# EAGLE board miniledcube (EAGLE 5.10)
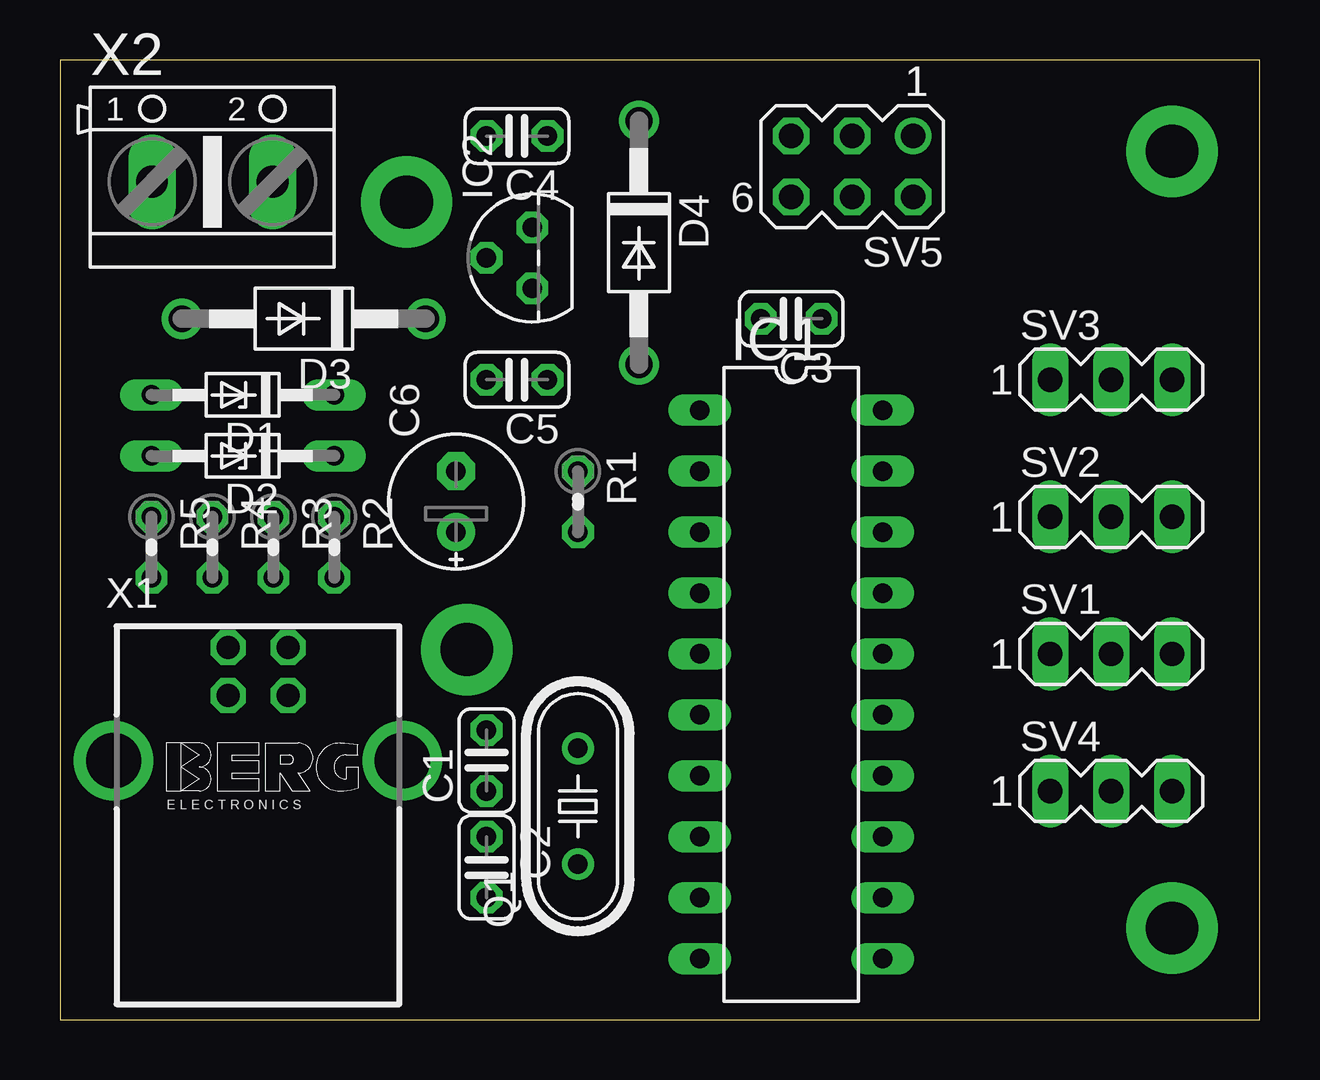
[diagram p0: board, top side]
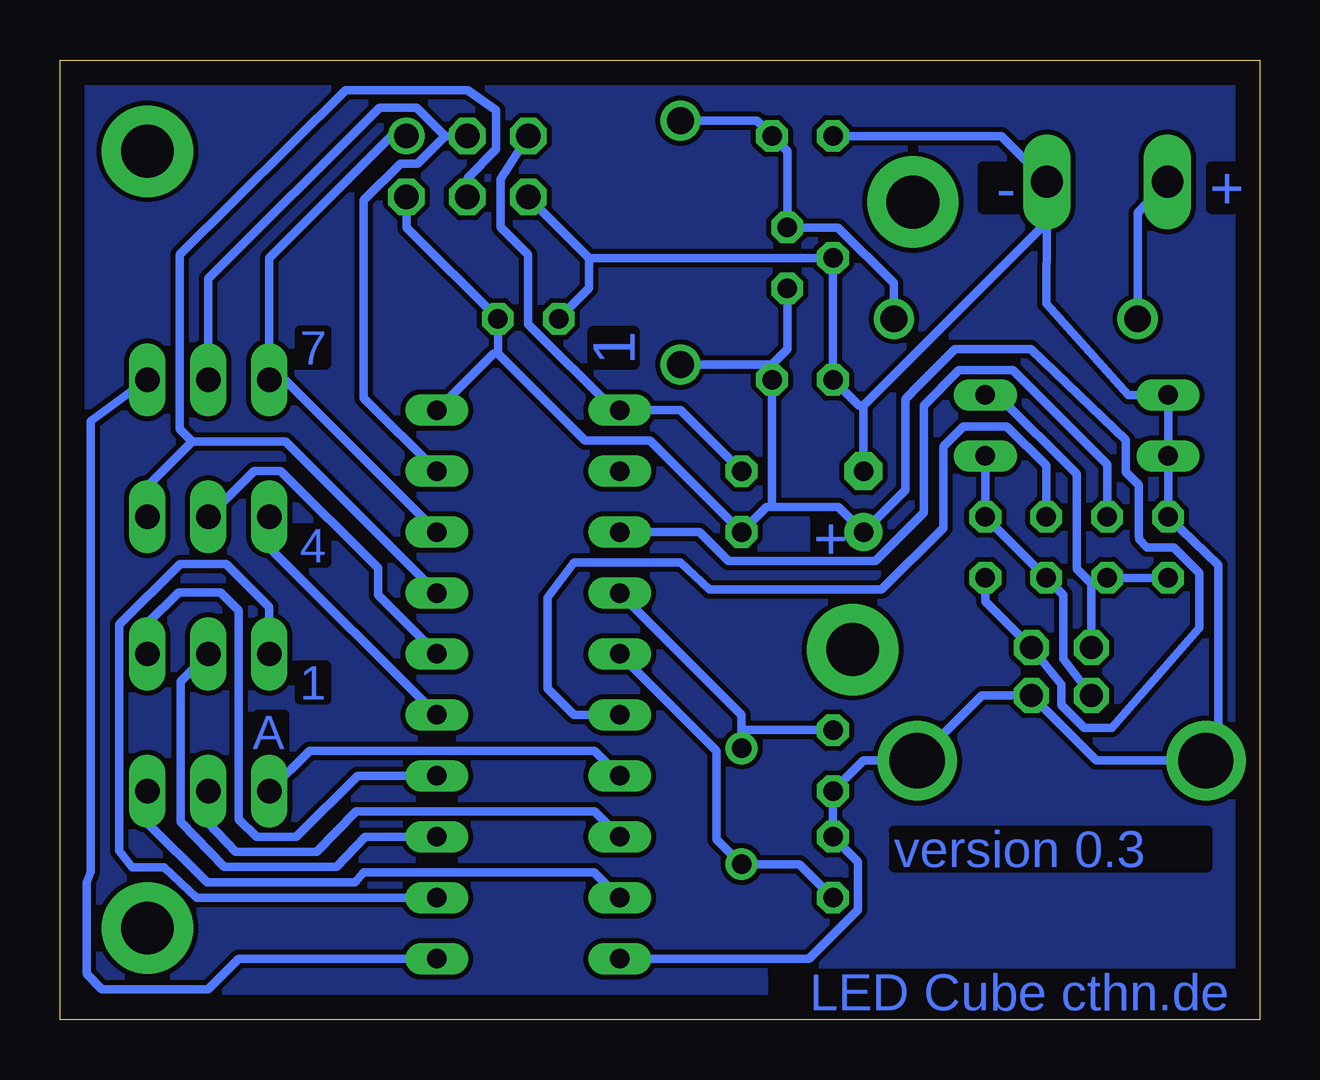
[diagram p1: board, bottom side, seen from below]

Size 50 x 40 mm. Coordinates in mm from the lower left corner, seen from the top.
Outline: 0,0 50,0 50,40 0,40 0,0
Copper layers (1*16): Top 0.035mm / dielectric 1.5mm / Bottom 0.035mm
Design rules "default *": minimum track width 14mil, minimum drill 24mil, track to track 8mil, track to pad 8mil, pad to pad 8mil, via to via 8mil, smd to smd 8mil, copper to edge 40mil, drill to drill 8mil, minimum pad ring 10mil, minimum via ring 8mil, stop-mask expansion 4mil, vias tented up to drill 0mil, thermal gap 10mil

## Footprints (pad centres in the part's own frame; a part is rotated, then mirrored left to right if it is on the bottom)
C025-024X044 = drill 0.813 octagon: 1 -1.27,0; 2 1.27,0
E2,5-6E = drill 0.813 pad 1.575 round: + -1.27,0 | drill 0.813 pad 1.575 octagon: - 1.27,0
DO34Z7 = drill 0.813 long: A 3.81,0; C -3.81,0
DO41-10 = drill 1.118 round: A 5.08,0; C -5.08,0
DIL20 = drill 0.813 long: 1 -11.43,-3.81; 2 -8.89,-3.81; 3 -6.35,-3.81; 4 -3.81,-3.81; 5 -1.27,-3.81; 6 1.27,-3.81; 7 3.81,-3.81; 8 6.35,-3.81; 9 8.89,-3.81; 10 11.43,-3.81; 11 11.43,3.81; 12 8.89,3.81; 13 6.35,3.81; 14 3.81,3.81; 15 1.27,3.81; 16 -1.27,3.81; 17 -3.81,3.81; 18 -6.35,3.81; 19 -8.89,3.81; 20 -11.43,3.81
TO92 = drill 0.813 octagon: 1 -1.27,0; 2 0,1.905; 3 1.27,0
HC49/S = drill 0.813 round: 1 -2.413,0; 2 2.413,0
0204V = drill 0.813 octagon: 1 -1.27,0; 2 1.27,0
MA03-1 = drill 1.016 long: 1 -2.54,0; 2 0,0; 3 2.54,0
MA03-2 = drill 1.016 round: 1 -2.54,-1.27 | drill 1.016 octagon: 2 -2.54,1.27; 3 0,-1.27; 4 0,1.27; 5 2.54,-1.27; 6 2.54,1.27
PN61729-S = drill 0.95 octagon: 1 1.25,4.71; 2 -1.25,4.71; 3 -1.25,2.71; 4 1.25,2.71 | drill 2.3 pad 2.9 round: S1 -6.02,0; S2 6.02,0
AK500/2 = drill 1.321 long: 1 -2.515,0; 2 2.515,0

## Placement (x,y rotation side)
C1  22p  [C025-024X044]  17.78,10.79 90 top
C2  22p  [C025-024X044]  17.78,6.35 270 top
C3  100n  [C025-024X044]  30.48,29.21 180 top
C4  100n  [C025-024X044]  19.05,36.83 180 top
C5  100n  [C025-024X044]  19.05,26.67 180 top
C6  4µ7  [E2,5-6E]  16.51,21.59 90 top
D1  3V6  [DO34Z7]  7.62,26.04 180 top
D2  3V6  [DO34Z7]  7.62,23.5 180 top
D3  1n4148  [DO41-10]  10.16,29.21 180 top
D4  1n4148  [DO41-10]  24.13,32.38 270 top
IC1  ATTINY2313V-10P  [DIL20]  30.48,13.97 270 top
IC2  78L05  [TO92]  19.68,31.75 90 top
Q1  [HC49/S]  21.59,8.89 90 top
R1  10k  [0204V]  21.59,21.59 270 top
R2  1k5  [0204V]  11.43,19.68 270 top
R3  69  [0204V]  8.89,19.68 270 top
R4  69  [0204V]  6.35,19.68 270 top
R5  1M  [0204V]  3.81,19.68 270 top
SV1  [MA03-1]  43.81,15.24 0 top
SV2  [MA03-1]  43.81,20.95 0 top
SV3  [MA03-1]  43.81,26.67 0 top
SV4  [MA03-1]  43.81,9.53 0 top
SV5  ISP  [MA03-2]  33.02,35.56 180 top
X1  USB  [PN61729-S]  8.26,10.79 0 top
X2  [AK500/2]  6.35,34.92 0 top

## Library data of the parts
C1-C6 R1-R5 = rcl
D1-D4 = diode
IC1 = avr
IC2 = linear
Q1 = crystal
SV1-SV5 = con-lstb; OC_FARNELL: unknown; OC_NEWARK: unknown
X1 = con-berg; OC_FARNELL: unknown; OC_NEWARK: unknown
X2 = con-ptr500; OC_FARNELL: unknown; OC_NEWARK: unknown

## Nets
1: IC1.12 SV1.1
2: IC1.13 SV1.2
3: IC1.14 SV1.3
4: IC1.15 SV2.1
5: IC1.16 SV2.2
6_MOSI: IC1.17 SV2.3 SV5.4
7_MISO: IC1.18 SV3.1 SV5.1
8_SCK: IC1.19 SV3.2 SV5.3
9: IC1.11 SV3.3
+5V: C3.1 C5.1 C6.+ D4.A IC1.20 IC2.1 R1.2 R2.2 SV5.2 X1.1
A: IC1.7 SV4.1
B: IC1.8 SV4.2
C: IC1.9 SV4.3
D+: D2.C R2.1 R3.2 X1.3
D-: D1.C R4.2 R5.2 X1.2
GND: C1.1 C2.1 C3.2 C4.2 C5.2 C6.- D1.A D2.A IC1.10 IC2.2 R5.1 SV5.6 X1.4 X1.S1 X1.S2 X2.2
N$1: C1.2 IC1.4 Q1.2
N$2: C2.2 IC1.5 Q1.1
N$3: IC1.6 R3.1
N$4: IC1.3 R4.1
N$5: C4.1 D3.C D4.C IC2.3
RESET: IC1.1 R1.1 SV5.5
VCC: D3.A X2.1

## Tracks (layer width: path | path; a pad name or v marks a point on that pad's centre or on a via)
1
  Bottom 0.356: IC1.12 44.3,5.08 45.65,6.35 46.99,6.35 47.52,7.03 47.52,16.47 44.99,19 43.07,19 41.27,17.2 SV1.1
2
  Bottom 0.356: IC1.13 37.29,7.62 38.47,6.37 43.15,6.37 44.96,8.23 44.96,14.09 SV1.2
3
  Bottom 0.356: SV1.3 46.35,16.51 45.06,17.8 43.3,17.8 42.55,17.05 42.55,8.35 41.8,7.61 40.15,7.61 37.6,10.16 IC1.14
4
  Bottom 0.356: SV2.1 41.27,19.68 IC1.15
5
  Bottom 0.356: SV2.2 41.9,22.87 40.79,22.87 36.74,18.82 36.74,17.69 IC1.16
6_MOSI
  Bottom 0.356: 44.49,24.09 40.6,24.09 IC1.17 | 44.49,24.09 46.35,22.23 SV2.3 | SV5.4 33.02,35.08 31.83,36.27 31.83,37.9 33.02,38.73 38.1,38.73 45.01,31.88 45.01,24.61 44.49,24.09
7_MISO
  Bottom 0.356: IC1.18 40.64,26.67 SV3.1 41.27,31.75 36.2,36.83 SV5.1
8_SCK
  Bottom 0.356: IC1.19 37.34,25.91 37.34,34.15 35.81,35.69 35.09,35.69 33.94,36.83 | 33.94,36.83 35.13,38.02 36.69,38.02 43.81,30.89 SV3.2 | 33.94,36.83 SV5.3
9
  Bottom 0.356: IC1.11 42.55,2.54 43.81,1.27 48.26,1.27 48.9,1.91 48.9,5.71 48.72,6.17 48.72,24.94 SV3.3
+5V
  Bottom 0.356: SV5.2 35.56,33.02 C3.1 31.75,27.76 | 31.75,27.76 31.93,27.76 IC1.20 | 31.75,27.76 28.12,24.13 25.4,24.13 R1.2 20.55,21.36 20.32,21.36 | 20.32,27.3 C5.1 20.32,21.36 | IC2.1 19.68,27.94 20.32,27.3 | 20.32,27.3 D4.A | 20.32,21.36 17.55,21.36 C6.+ 14.77,22.06 14.77,25.23 14.77,25.86 14.21,26.45 12.7,27.94 9.53,27.94 5.56,24.16 5.57,22.81 5.03,22.27 | 5.03,22.27 5.03,20.18 5.02,20.02 4.7,19.68 3.58,19.68 2.51,18.62 2.51,16.32 6.15,12.16 7.3,12.16 8.26,13.11 8.26,13.97 X1.1 11.43,17.43 R2.2 | 5.03,22.27
A
  Bottom 0.356: SV4.1 39.6,11.2 27.71,11.2 IC1.7
B
  Bottom 0.356: IC1.8 27.72,8.67 37.66,8.67 39.29,6.99 42.68,6.99 43.81,8.2 SV4.2
C
  Bottom 0.356: IC1.9 27.73,6.14 37.34,6.14 37.69,5.73 43.85,5.73 46.35,8.2 SV4.3
D+
  Bottom 0.356: D2.C R2.1 R3.2 8.18,17.7 8.18,15.03 X1.3
D-
  Bottom 0.356: R5.2 R4.2 6.6,18.17 7,18.17 | X1.2 7,18.17 | 7,18.17 7.62,18.78 7.62,22.73 10.92,26.04 D1.C
GND
  Bottom 0.356: 27.94,31.75 IC2.2 C5.2 16.7,25.59 16.51,25.59 | 27.94,31.75 27.94,30.48 C3.2 | 27.94,31.75 SV5.6 | IC1.10 18.77,2.54 16.73,4.58 16.73,6.57 C2.1 C1.1 16.51,10.79 X1.S2 11.56,13.51 X1.4 6.79,10.79 X1.S1 1.71,10.78 1.73,18.95 R5.1 D2.A D1.A 5.47,26.04 8.89,29.84 8.87,33.24 | C4.2 10.77,36.83 X2.2 8.87,33.24 | 16.51,25.59 C6.- | 8.87,33.24 16.51,25.59
N$1
  Bottom 0.356: 21.59,12.06 21.59,12.7 IC1.4 | 21.59,12.06 Q1.2 | C1.2 21.59,12.06
N$2
  Bottom 0.356: IC1.5 22.63,11.2 22.63,7.52 Q1.1 19.18,6.48 C2.2
N$3
  Bottom 0.356: R3.1 8.89,23.1 10.52,24.73 12.33,24.73 13.19,23.88 13.19,20.49 15.75,17.93 22.93,17.93 24.13,19.05 28.57,19.05 29.68,17.6 29.68,13.8 28.57,12.7 IC1.6
N$4
  Bottom 0.356: IC1.3 23.34,20.32 22.14,19.12 16.01,19.12 14,21.13 14,25.6 12.53,27.08 10.29,27.08 6.35,23.14 R4.1
N$5
  Bottom 0.356: D3.C 15.24,30.69 17.57,33.02 IC2.3 19.68,36.2 C4.1 20.95,37.47 D4.C
N$6
  pour Bottom: 0,40.01 50.16,40.01 50.16,0 0,0
N$7  (via drill 2.2 pad 3.81)
  other vias: 14.45,34.08
N$8  (via drill 2.2 pad 3.81)
  other vias: 46.35,36.2
N$9  (via drill 2.2 pad 3.81)
  other vias: 16.96,15.42
N$61  (via drill 2.2 pad 3.81)
  other vias: 46.35,3.81
RESET
  Bottom 0.356: SV5.5 31.64,35.03 31.64,33.04 30.48,31.88 30.48,29 26.88,25.4 IC1.1 24.13,25.4 R1.1
VCC
  Bottom 0.356: X2.1 5.08,33.63 D3.A

## Text on the board
Bottom: + | - | 1 | 7 | + | 4 | 1 | A | version 0.3 | LED Cube cthn.de